# Allegro board board1.brd
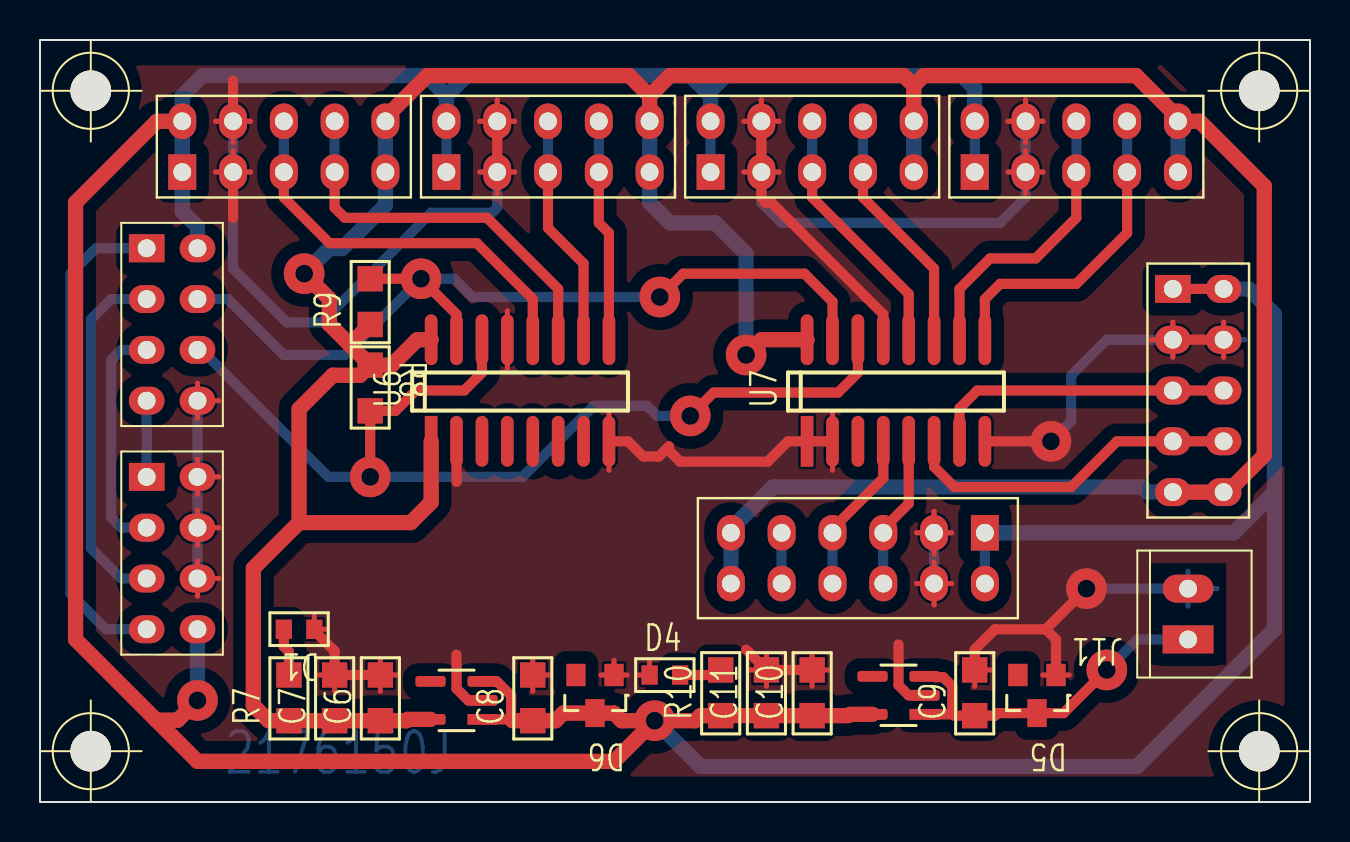
[diagram p0: board, top side]
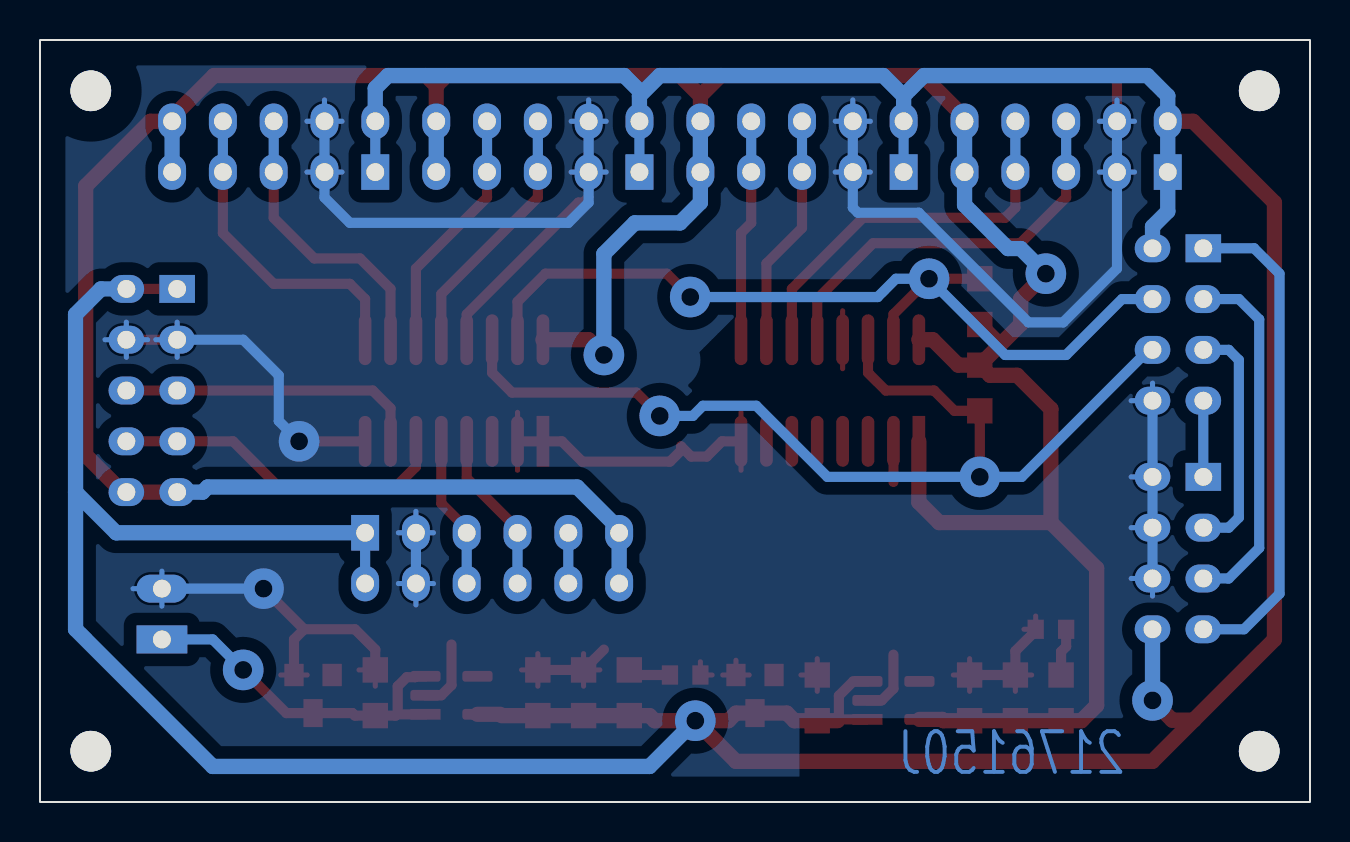
[diagram p1: board, bottom side, seen from below]

Outline 63.5 x 38.1 mm; copper layers: TOP, BOTTOM. Coordinates in mm from the lower left corner of the outline.
Outline path: rectangle 0,0 63.5,38.1

## Design rules (mm)
constraint set DEFAULT: min track width 0.254
nets with their own width: min track width 0.508; nets 3.3V 5V

## Placement (name value [footprint] x y rotation side)
C6  0.1uF  [GU-C0805]  17.02 4.06 90 top
C7  2.2uF  [GU-C0805]  14.73 4.06 90 top
C8  2.2uF  [GU-C0805]  24.64 4.06 90 top
C9  2.2uF  [GU-C0805]  46.74 4.32 90 top
C10  2.2uF  [GU-C0805]  38.61 4.32 90 top
C11  0.1uF  [GU-C0805]  36.32 4.32 90 top
D1  LED  [GU-R0603]  13.72 8.64 180 top
D4  LED  [GU-R0603]  30.48 6.35 0 top
D5  DIODE BREAKDOWN  [GU-SOT23]  50.8 6.35 180 top
D6  DIODE BREAKDOWN  [GU-SOT23]  28.7 6.35 180 top
J11  HEADER 2  [GU-MOLEX2]  57.4 8.13 180 top
J19  CON8  [GU-HEADER8]  5.33 27.69 0 top
J28  HEADER 10  [GU-HEADER2X5]  20.32 31.5 0 top
J29  HEADER 10  [GU-HEADER2X5]  7.11 31.5 0 top
J30  HEADER 10  [GU-HEADER2X5]  33.53 31.5 0 top
J31  HEADER 10  [GU-HEADER2X5]  46.74 31.5 0 top
J32  HEADER 10  [GU-HEADER2X5]  56.64 25.65 270 top
J33  CON8  [GU-HEADER8]  5.33 16.26 0 top
J35  12 HEADER  [GU-HEADER2X6]  47.24 13.46 270 top
NOREF  -  [unnamed]  2.54 35.56 0 top
NOREF#2  -  [unnamed]  60.96 35.56 0 top
NOREF#3  -  [unnamed]  60.96 2.54 0 top
NOREF#4  -  [unnamed]  2.54 2.54 0 top
R7  55  [GU-R0805]  12.45 4.06 90 top
R8  4.7K  [GU-R0805]  16.51 21.84 270 top
R9  4.7K  [GU-R0805]  16.51 23.88 90 top
R10  55  [GU-R0805]  34.04 4.32 90 top
U3  MIC5219  [SOT23-5P95_280X130L35X42M]  20.83 5.08 90 top
U4  MIC5202  [SOT23-5P95_280X130L35X42M]  42.93 5.33 90 top
U6  PCA9546AD  [GU-SOIC16]  19.56 18.03 0 top
U7  PCA9546AD  [GU-SOIC16]  38.35 18.03 0 top

## Library data of the parts
C6 C11 = CAPACITOR NON-POL
C7-C10 = C_elect_0
D1 D4 = LED
D5 D6 = DIODE BREAKDOWN_0
J11 = HEADER 2
J19 J33 = CON8
J28-J32 = HEADER 10
J35 = 12 HEADER
R7-R10 = RESISTOR
U3 U4 = MIC5205
U6 U7 = PCA9546AD

## Footprints (pads in the part's own frame, mm; a bottom-side part is the same pattern mirrored in y, then rotated)
GU-C0805
  rect 1.27x1.27 smd: 1(0,0) 2(2.286,0)
GU-HEADER2X5
  rect 1.397x1.778 hole 0.889: 1(0,0)
  oval 1.397x1.778 hole 0.889: 2(0,2.54) 3(2.54,0) 4(2.54,2.54) 5(5.08,0) 6(5.08,2.54) 7(7.62,0) 8(7.62,2.54) 9(10.16,0) 10(10.16,2.54)
GU-HEADER2X6
  rect 1.778x1.397 hole 0.889: 1(0,0)
  oval 1.778x1.397 hole 0.889: 2(2.54,0) 3(0,-2.54) 4(2.54,-2.54) 5(0,-5.08) 6(2.54,-5.08) 7(0,-7.62) 8(2.54,-7.62) 9(0,-10.16) 10(2.54,-10.16) 11(0,-12.7) 12(2.54,-12.7)
GU-HEADER8
  rect 1.778x1.397 hole 0.889: 1(0,0)
  oval 1.778x1.397 hole 0.889: 2(2.54,0) 3(0,-2.54) 4(2.54,-2.54) 5(0,-5.08) 6(2.54,-5.08) 7(0,-7.62) 8(2.54,-7.62)
GU-MOLEX2
  rect 2.54x1.397 hole 0.889: 1(0,0)
  oval 2.54x1.397 hole 0.889: 2(0,-2.54)
GU-R0603
  rect 0.813x0.965 smd: 1(0,0) 2(1.524,0)
GU-R0805
  rect 1.27x1.27 smd: 1(0,0) 2(2.286,0)
GU-SOIC16
  rect 0.635x2.54 smd: 1(0,0)
  oval 0.635x2.54 smd: 2(1.27,0) 3(2.54,0) 4(3.81,0) 5(5.08,0) 6(6.35,0) 7(7.62,0) 8(8.89,0) 9(8.89,5.08) 10(7.62,5.08) 11(6.35,5.08) 12(5.08,5.08) 13(3.81,5.08) 14(2.54,5.08) 15(1.27,5.08) 16(0,5.08)
GU-SOT23
  rect 0.965x1.118 smd: 1(0,0) 2(1.905,0)
  rect 0.965x1.397 smd: 3(0.953,1.905)
SOT23-5P95_280X130L35X42M
  rect 0.54x1.51 smd: 1(-0.95,-1.3)
  rrect 0.54x1.51 smd: 2(0,-1.3) 3(0.95,-1.3) 4(0.95,1.3) 5(-0.95,1.3)
unnamed
  round 2.032 hole 3.962 unplated: (0,0)

## Nets
3.3V: C6.1 C7.1 J28.9 J28.10 J29.9 J29.10 J30.9 J30.10 J31.9 J31.10 J32.9 J32.10 J35.11 J35.12 R7.1 R8.1 R9.1 U3.5(OUT) U6.1 U6.16 U7.16
5V: C8.1 C10.1 C11.1 D6.3 J19.2 J28.1 J28.2 J29.1 J29.2 J30.1 J30.2 J31.1 J31.2 J32.1 J32.2 J33.8 J35.1 J35.2 R10.1 U3.1 U3.3 U4.5(OUT)
GND: C6.2 C7.2(-) C8.2(-) C9.2(-) C10.2(-) C11.2 D1.1(CATHODE) D4.1(CATHODE) D5.1 D6.1 J11.2 J19.8 J28.3 J28.4 J29.3 J29.4 J30.3 J30.4 J31.3 J31.4 J32.3 J32.4 J33.2 J33.4 J33.6 J35.3 J35.4 U3.2 U4.2 U6.2 U6.8(VSS) U6.13 U7.1 U7.2 U7.8(VSS) U7.13
VBAT: C9.1 D5.3 J11.1 U4.1 U4.3
GPIO_0: J19.1 J33.7
GPIO_1: J19.3 J33.5
GPIO_2: J19.5 J33.3
GPIO_3: J19.7 J33.1
RESET: U6.3
RESET1: U7.3
SCL0: U6.5
SCL1: U6.7
SCL2: J28.5 J28.6 U6.10
SCL3: J29.5 J29.6 U6.12
SCL4: J35.5 J35.6 U7.5
SCL5: J32.5 J32.6 U7.7
SCL6: J31.5 J31.6 U7.10
SCL7: J30.5 J30.6 U7.12
SCL_IN: J19.6 R8.2 U6.14 U7.14
SDA0: U6.4
SDA1: U6.6
SDA2: J28.7 J28.8 U6.9
SDA3: J29.7 J29.8 U6.11
SDA4: J35.7 J35.8 U7.4
SDA5: J32.7 J32.8 U7.6
SDA6: J31.7 J31.8 U7.9
SDA7: J30.7 J30.8 U7.11
SDA_IN: J19.4 R9.2 U6.15 U7.15
N777146: D1.2 R7.2
N787441: D4.2 R10.2
N824382: J35.9 J35.10

Pads without a net: D5 2; D6 2; U3 4; U4 4

## Via types
v1: diameter 2.032, hole 0.889, TOP to BOTTOM, 11 vias

## Routing (per net, layer and track width the routed paths; a pad name or vN(x,y) marks a point on that pad's centre or on a via; arc(x,y) is an arc through that point)
3.3V: length 179.9
  TOP w0.762: R8.1 17.59,21.84 18.86,23.11 U6.16 ; R8.1 15.49,22.86 ; R8.1 16,21.34 14.64,21.34 12.95,19.65 12.95,13.97 ; 30.48,35.31 J28.10 ; 30.48,35.31 29.46,36.32 19.37,36.32 17.27,34.23 J29.10 ; 30.48,35.31 31.5,36.32 43.18,36.32 43.69,35.81 ; 12.95,13.97 10.67,11.68 10.67,4.83 11.43,4.06 R7.1 C7.1 C6.1 18.33,4.06 18.39,4.13 U3.5 ; 12.95,13.97 18.54,13.97 19.56,14.99 U6.1 ; 15.49,22.86 R9.1 ; 15.49,22.86 14.47,23.89 14.47,25.16 v1(13.21,26.42) ; U7.16 36.07,23.11 v1(35.31,22.35) ; J32.9 J32.10 59.37,15.49 61.21,17.34 61.21,30.8 57.98,34.04 J31.10 56.9,34.23 54.8,36.32 44.2,36.32 43.69,35.81 ; 43.69,35.81 J30.10
  BOTTOM w0.762: v1(13.21,26.42) 14.47,27.67 15.1,27.67 17.27,29.84 J29.9 J29.10 ; J28.10 J28.9 30.48,29.97 31.5,28.96 33.76,28.96 35.31,27.41 v1(35.31,22.35) ; J31.9 J31.10 ; J30.9 J30.10 ; J32.9 55.37,15.49 55.12,15.75 36.64,15.75 34.54,13.65 J35.11 J35.12
5V: length 226
  TOP w0.508: 23.62,4.06 23.56,4.13 ; 23.56,4.13 23.56,5.31 22.84,6.03 U3.3 ; 23.56,4.13 U3.1 ; 40.49,4.38 40.42,4.32 ; J32.1 J32.2
  TOP w0.762: U4.5 40.49,4.38 ; 23.62,4.06 C8.1 25.78,4.06 26.16,4.45 D6.3 28.7,4.45 29.08,4.06 v1(30.73,4.06) ; 5.81,4.09 1.78,8.13 1.78,29.97 5.84,34.04 J29.2 ; 5.81,4.09 6.89,4.09 v1(7.87,5.08) ; 5.81,4.09 7.87,2.03 28.7,2.03 v1(30.73,4.06) ; v1(30.73,4.06) 32.77,4.06 33.02,4.32 R10.1 C11.1 C10.1 40.42,4.32
  BOTTOM w0.508: J35.2 J35.1 ; J31.1 J31.2 ; J30.1 J30.2 ; J28.1 J28.2 ; 33.53,35.56 33.53,35.31
  BOTTOM w0.762: 33.53,35.56 34.29,36.32 46.1,36.32 46.74,35.69 J31.2 ; 61.72,15.49 61.72,8.64 54.86,1.78 33.02,1.78 v1(30.73,4.06) ; 61.72,15.49 59.69,13.46 J35.1 ; 61.72,15.49 61.72,24.38 60.45,25.65 J32.2 ; 20.32,35.31 21.34,36.32 32.51,36.32 33.53,35.31 J30.2 ; 20.32,35.31 J28.2 ; 20.32,35.31 19.3,36.32 8.13,36.32 7.11,35.31 J29.2 J29.1 7.11,29.53 7.87,28.77 J19.2 ; v1(7.87,5.08) J33.8
GND: length 258
  TOP w0.254: 44.7,9.85 J35.4 ; J35.4 43.83,10.92 ; J35.4 44.7,11.99 ; J35.4 45.58,10.92 ; C10.2 38.61,7.42 ; C10.2 39.42,6.6 ; C10.2 38.61,5.79 ; 39.62,19.48 U7.2 39.62,16.59 ; C11.2 36.32,7.42 ; C11.2 35.51,6.6 ; C11.2 36.32,5.79 ; 29.9,6.35 D4.1 30.48,7.01 ; 21.98,31.5 J28.3 ; J28.3 23.74,31.5 ; J28.3 22.86,30.43 ; 35.19,34.04 J30.4 ; J30.4 36.07,35.1 ; J30.4 36.94,34.04 ; 7.87,10.3 J33.6 ; J33.6 7.87,12.05 ; J33.6 8.94,11.18 ; 23.37,21.67 U6.13 23.37,24.56 ; J32.3 56.64,23.99 ; J32.3 55.57,23.11 ; J32.3 56.64,22.24 ; 50.14,6.35 D5.1 51.46,6.35 ; J33.4 7.87,14.59 ; J33.4 7.87,12.84 ; J33.4 8.94,13.72 ; J31.4 50.15,34.04 ; J31.4 49.28,35.1 ; J31.4 48.4,34.04 ; J31.4 49.28,32.97 ; 48.4,31.5 J31.3 ; J31.3 49.28,30.43 ; J31.3 49.28,32.56 ; J31.3 50.15,31.5 ; 47.55,6.6 C9.2 46.74,5.79 ; 28.04,6.35 D6.1 ; D6.1 28.7,7.09 ; D6.1 29.36,6.35 ; 28.45,16.59 U6.8 28.45,19.48 ; 7.87,15.38 J33.2 ; J33.2 8.94,16.26 ; J33.2 7.87,17.13 ; 59.18,22.24 J32.4 59.18,23.99 ; 8.78,31.5 J29.3 ; J29.3 9.65,32.56 ; J29.3 10.53,31.5 ; J28.4 22.86,35.1 ; J28.4 21.98,34.04 ; J28.4 23.74,34.04 ; 36.94,31.5 J30.3 35.19,31.5 ; 17.02,5.54 C6.2 ; C6.2 17.02,7.16 ; C6.2 17.83,6.35 ; J19.8 8.94,20.07 ; J19.8 7.87,19.19 ; J19.8 7.87,20.94 ; 14.73,5.54 C7.2 13.92,6.35 ; J35.3 44.7,14.53 ; J35.3 43.83,13.46 ; J35.3 45.58,13.46 ; J35.3 44.7,12.39 ; C8.2 24.64,7.16 ; C8.2 24.64,5.54 ; C8.2 25.45,6.35 ; 14.3,8.64 D1.1 13.72,9.3 ; J29.4 10.53,34.04 ; J29.4 9.65,32.97 ; J29.4 8.78,34.04
  TOP w0.508: D5.1 50.8,8.13 50.29,8.64 ; v1(52.32,10.67) 50.29,8.64 ; 50.29,8.64 47.75,8.64 46.74,7.62 C9.2 ; 20.83,16 U6.2 ; U3.2 21.42,5.08 20.83,5.67 20.83,7.37 ; 35.31,7.62 C11.2 C10.2 ; U7.8 v1(50.55,18.03) ; J30.4 J30.3 36.07,30.23 36.26,30.04 36.26,29.97 36.58,29.97 42.16,24.38 U7.13 ; 9.65,36.07 J29.4 ; D1.1 13.72,8.56 14.73,7.54 C7.2 C6.2 ; U6.8 29.4,18.03 30.16,17.27 30.94,17.27 31.45,17.78 31.45,17.58 32,17.02 36.39,17.02 37.4,18.03 U7.1 U7.2 ; U4.2 43.43,5.33 42.93,5.84 42.93,7.87 ; J28.3 J28.4 ; 9.65,29.21 J29.3 ; J32.3 J32.4
  BOTTOM w0.254: J28.4 23.74,34.04 ; J28.4 22.86,35.1 ; J28.4 21.98,34.04 ; 8.78,34.04 J29.4 ; J29.4 9.65,35.1 ; J29.4 10.53,34.04 ; 23.74,31.5 J28.3 21.98,31.5 ; J33.4 8.94,13.72 ; J32.3 56.64,23.99 ; J32.3 57.71,23.11 ; J32.3 56.64,22.24 ; J31.4 49.28,35.1 ; J31.4 48.4,34.04 ; J31.4 50.15,34.04 ; 57.4,9.79 J11.2 ; J11.2 58.85,10.67 ; J11.2 57.4,11.54 ; J30.4 36.07,35.1 ; J30.4 36.94,34.04 ; J30.4 35.19,34.04 ; 43.83,10.92 J35.4 ; J35.4 45.58,10.92 ; J35.4 44.7,9.85 ; 10.53,31.5 J29.3 8.78,31.5 ; 58.11,23.11 J32.4 ; J32.4 59.18,22.24 ; J32.4 59.18,23.99 ; J32.4 60.25,23.11 ; 36.94,31.5 J30.3 35.19,31.5 ; 50.15,31.5 J31.3 48.4,31.5 ; 8.94,20.07 J19.8 7.87,20.94 ; 7.87,10.3 J33.6 8.94,11.18 ; J33.2 8.94,16.26 ; 43.83,13.46 J35.3 ; J35.3 44.7,14.53 ; J35.3 45.58,13.46
  BOTTOM w0.508: J31.4 J31.3 49.28,30.23 48.01,28.96 37.08,28.96 36.07,29.97 J30.3 J30.4 ; J33.6 J33.4 J33.2 J19.8 ; J28.4 J28.3 22.86,29.72 22.61,29.46 19.56,29.46 14.08,23.98 12.34,23.98 9.65,26.67 J29.3 J29.4 ; v1(50.55,18.03) 51.56,19.05 51.56,21.34 53.34,23.11 J32.3 ; J11.2 v1(52.32,10.67) ; J35.4 J35.3
VBAT: length 17.8
  TOP w0.508: 45.65,4.38 45.72,4.32 C9.1 47.75,4.32 47.88,4.45 D5.3 51.18,4.45 v1(53.34,6.6) ; 45.65,4.38 U4.1 ; 45.65,4.38 45.62,4.42 45.62,5.79 45.16,6.24 44.75,6.24 44.7,6.28 U4.3
  BOTTOM w0.508: v1(53.34,6.6) 54.86,8.13 J11.1
GPIO_0: length 24.9
  BOTTOM w0.508: J19.1 2.79,27.69 1.52,26.42 1.52,10.41 3.3,8.64 J33.7
GPIO_1: length 18.1
  BOTTOM w0.508: J19.3 3.56,25.15 2.54,24.13 2.54,12.7 4.06,11.18 J33.5
GPIO_2: length 11.9
  BOTTOM w0.508: J19.5 4.06,22.61 3.56,22.1 3.56,14.22 4.06,13.72 J33.3
GPIO_3: length 3.8
  BOTTOM w0.508: J33.1 J19.7
SCL2: length 11.7
  TOP w0.508: U6.10 27.18,26.92 25.4,28.7 J28.5
  BOTTOM w0.508: J28.5 J28.6
SCL3: length 20.4
  TOP w0.508: J29.5 12.19,30.23 14.48,27.94 21.84,27.94 24.64,25.15 U6.12
  BOTTOM w0.508: J29.5 J29.6
SCL4: length 7.6
  TOP w0.508: J35.5 42.16,13.65 43.43,14.92 U7.5
  BOTTOM w0.508: J35.6 J35.5
SCL5: length 16
  TOP w0.508: 45.97,17.27 U7.7 45.97,19.69 46.86,20.57 J32.5 J32.6
SCL6: length 14.7
  TOP w0.508: J31.5 51.82,29.21 49.78,27.18 47.5,27.18 45.97,25.65 U7.10
  BOTTOM w0.508: J31.5 J31.6
SCL7: length 12.9
  TOP w0.508: J30.5 38.61,30.23 43.43,25.4 U7.12
  BOTTOM w0.508: J30.5 J30.6
SCL_IN: length 51.2
  TOP w0.508: v1(16.51,16.26) R8.2 17.78,19.56 18.8,20.57 21.21,20.57 22.1,21.46 U6.14 ; v1(32.51,19.3) 33.68,20.47 39.9,20.47 40.89,21.46 U7.14
  BOTTOM w0.508: v1(32.51,19.3) 30.86,19.3 30.35,19.81 27.69,19.81 24.13,16.26 v1(16.51,16.26) 14.41,16.26 8.06,22.61 J19.6
SDA2: length 11.1
  TOP w0.508: U6.9 28.45,28.45 27.94,28.96 J28.7
  BOTTOM w0.508: J28.7 J28.8
SDA3: length 19.7
  TOP w0.508: U6.11 25.91,25.65 22.35,29.21 15.24,29.21 14.73,29.72 J29.7
  BOTTOM w0.508: J29.7 J29.8
SDA4: length 8.2
  TOP w0.508: U7.4 42.16,16.19 39.62,13.65 J35.7
  BOTTOM w0.508: J35.8 J35.7
SDA5: length 17.1
  TOP w0.508: U7.6 44.7,16.76 45.72,15.75 51.56,15.75 53.85,18.03 J32.7 J32.8
SDA6: length 16.1
  TOP w0.508: J31.7 54.36,28.45 51.82,25.91 48.01,25.91 47.24,25.15 U7.9
  BOTTOM w0.508: J31.7 J31.8
SDA7: length 12.4
  TOP w0.508: J30.7 41.15,30.23 44.7,26.67 U7.11
  BOTTOM w0.508: J30.7 J30.8
SDA_IN: length 44.2
  TOP w0.508: R9.2 v1(19.05,26.16) 20.83,24.38 U6.15 ; U7.15 39.62,25.02 38.23,26.42 32.16,26.42 v1(30.99,25.25)
  BOTTOM w0.508: v1(30.99,25.25) 21.61,25.25 20.7,26.16 v1(19.05,26.16) 15.24,22.35 12.19,22.35 9.4,25.15 J19.4
N777146: length 2.4
  TOP w0.508: R7.2 12.45,7.52 12.19,7.77 D1.2
N787441: length 2.1
  TOP w0.508: R10.2 33.78,6.35 D4.2
N824382: length 2.5
  BOTTOM w0.508: J35.10 J35.9

## Copper pours and planes (outline as drawn; the poured copper is in the pictures)
GND on TOP: 1.27,36.83 62.23,36.83 62.23,1.27 1.27,1.27 ; 34 cut-outs
GND on BOTTOM: 1.27,36.83 62.23,36.83 62.23,1.27 1.27,1.27 ; 22 cut-outs

## Text on the board
BOTTOM: 2176150J
